# EAGLE board CP2102 USB to Serial Breakout-Panel-v13 (EAGLE 6.5.0)
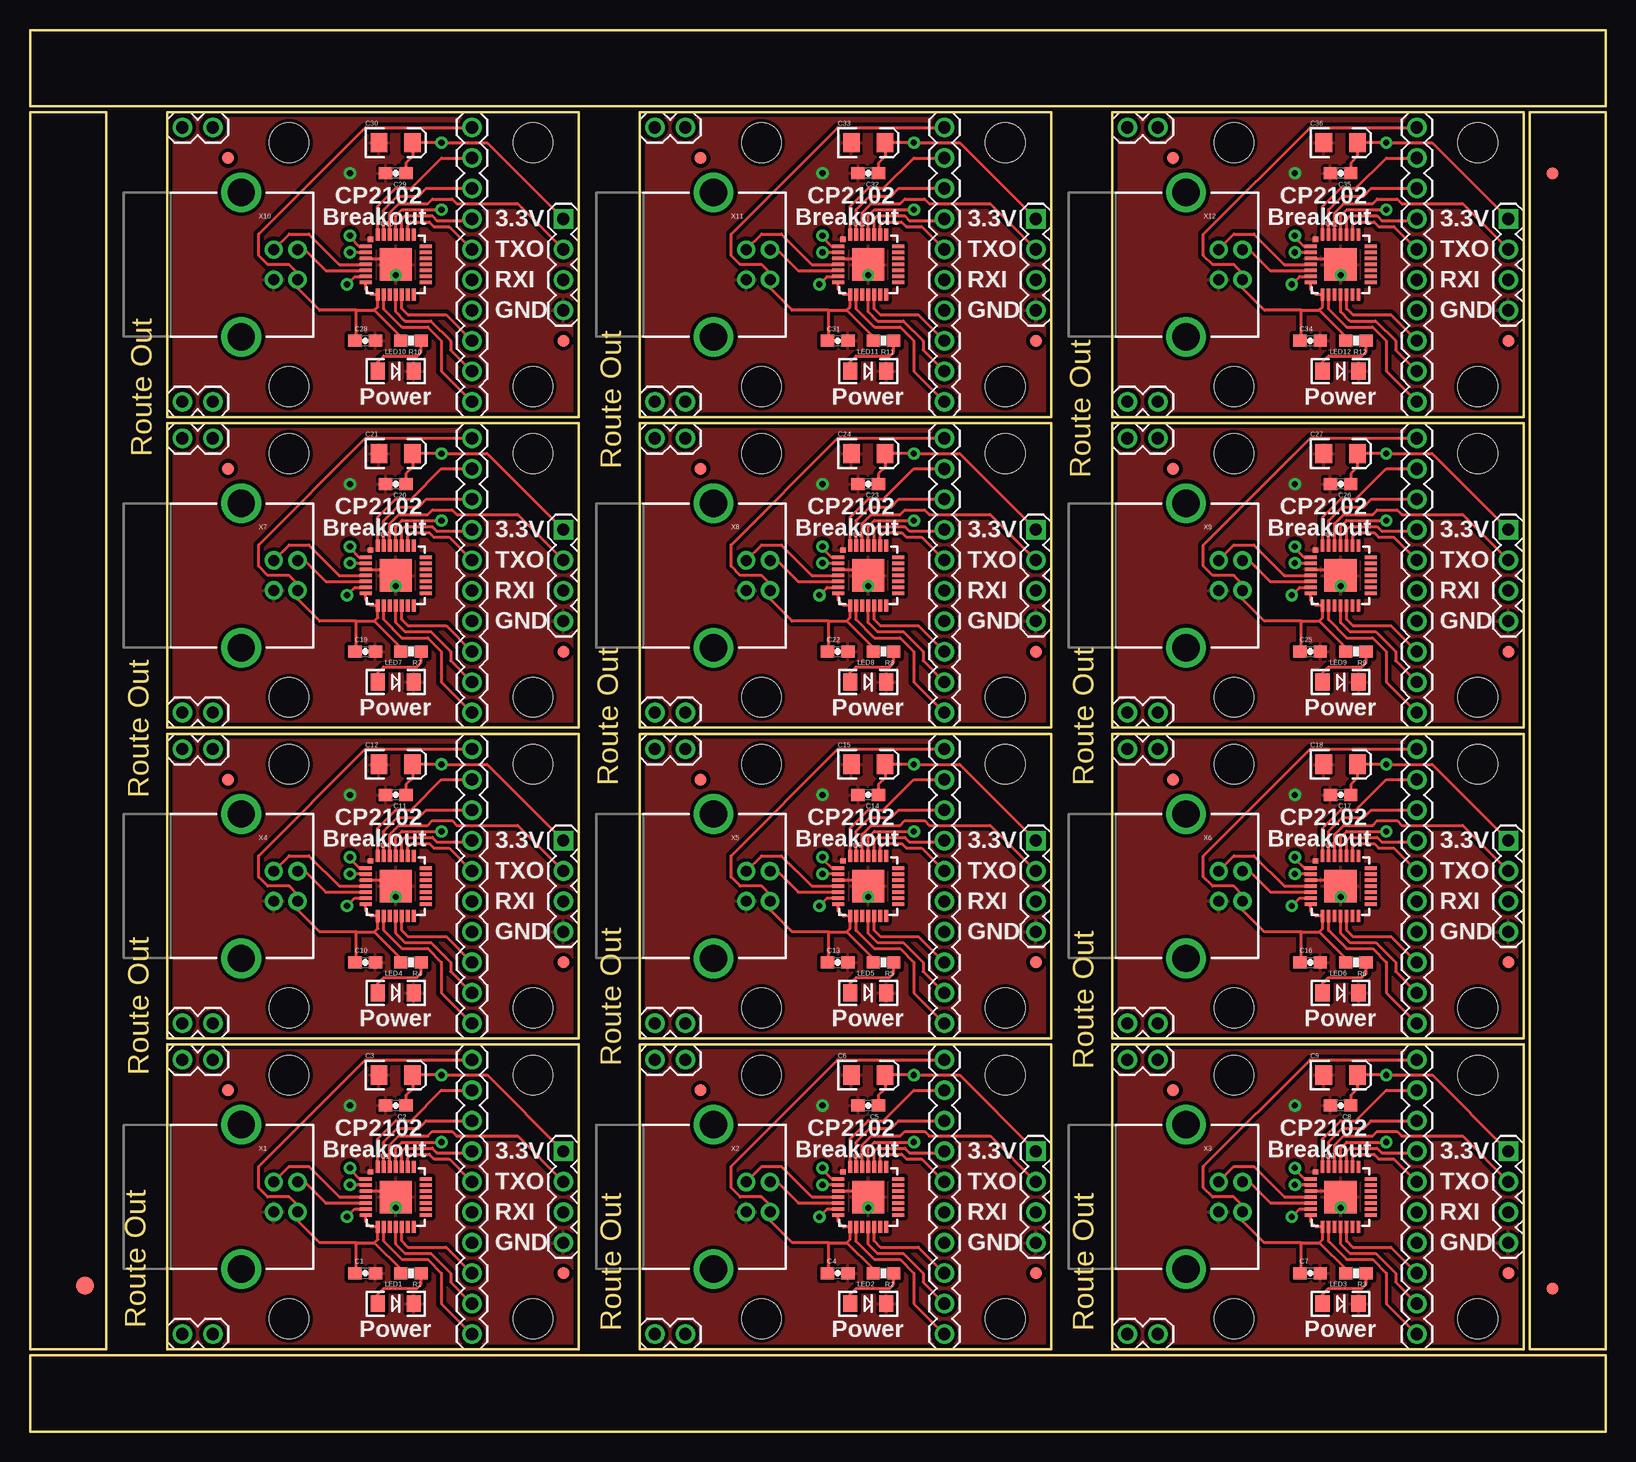
[diagram p0: board, top side]
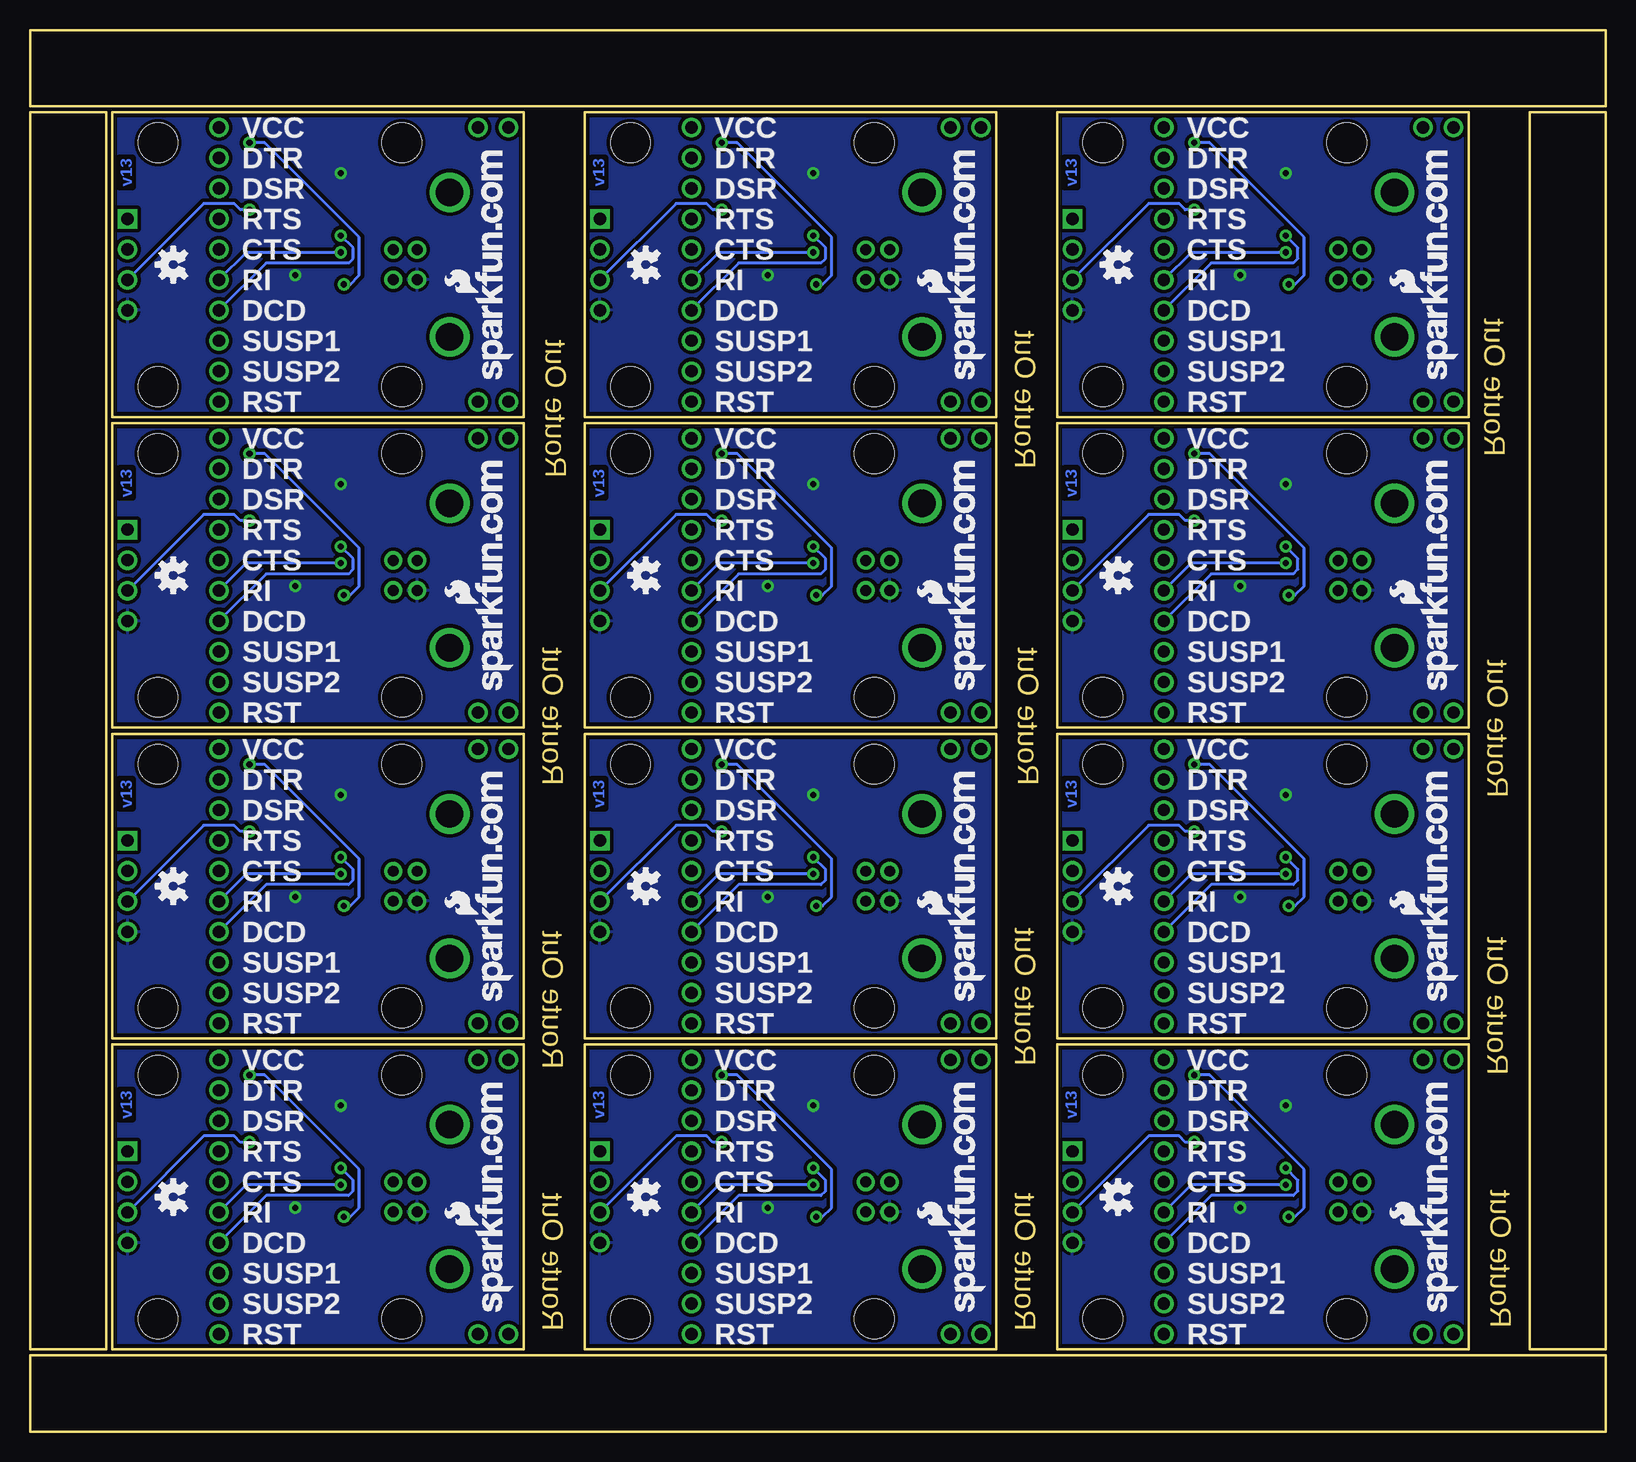
[diagram p1: board, bottom side, seen from below]

Size 131.32 x 116.84 mm. Coordinates in mm from the lower left corner, seen from the top.
Outline: 11.43,6.86 45.72,6.86 45.72,32.26 11.43,32.26 11.43,6.86
Outline: 50.8,6.86 85.09,6.86 85.09,32.26 50.8,32.26 50.8,6.86
Outline: 90.17,6.86 124.46,6.86 124.46,32.26 90.17,32.26 90.17,6.86
Outline: 11.43,32.77 45.72,32.77 45.72,58.17 11.43,58.17 11.43,32.77
Outline: 50.8,32.77 85.09,32.77 85.09,58.17 50.8,58.17 50.8,32.77
Outline: 90.17,32.77 124.46,32.77 124.46,58.17 90.17,58.17 90.17,32.77
Outline: 11.43,58.67 45.72,58.67 45.72,84.07 11.43,84.07 11.43,58.67
Outline: 50.8,58.67 85.09,58.67 85.09,84.07 50.8,84.07 50.8,58.67
Outline: 90.17,58.67 124.46,58.67 124.46,84.07 90.17,84.07 90.17,58.67
Outline: 11.43,84.58 45.72,84.58 45.72,109.98 11.43,109.98 11.43,84.58
Outline: 50.8,84.58 85.09,84.58 85.09,109.98 50.8,109.98 50.8,84.58
Outline: 90.17,84.58 124.46,84.58 124.46,109.98 90.17,109.98 90.17,84.58
Outline: 0,0 131.32,0 131.32,6.35 0,6.35 0,0
Outline: 6.35,6.86 6.35,109.98 0,109.98 0,6.86 6.35,6.86
Outline: 0,110.49 131.32,110.49 131.32,116.84 0,116.84 0,110.49
Outline: 124.97,109.98 124.97,6.86 131.32,6.86 131.32,109.98 124.97,109.98
Copper layers (1*16): Top 0.035mm / dielectric 1.5mm / Bottom 0.035mm
Design rules "SparkFun *": minimum track width 8mil, minimum drill 20mil, track to track 8mil, track to pad 8mil, pad to pad 7mil, via to via 8mil, smd to smd 8mil, copper to edge 10mil, drill to drill 8mil, minimum pad ring 12mil, minimum via ring 10mil, stop-mask expansion 4mil, vias tented up to drill 25mil, thermal gap 10mil

## Footprints (pad centres in the part's own frame; a part is rotated, then mirrored left to right if it is on the bottom)
0603-CAP = smd 1.1 x 1: 1 -0.85,0; 2 0.85,0
EIA3216 = smd 1.4 x 1.6: A 1.4,0; C -1.4,0
FIDUCIAL-1.5X3 = smd 1.5 x 1.5: 1 0,0
FIDUCIAL-1X2 = smd 1 x 1: 1 0,0
1X02 = drill 1.016: 1 0,0; 2 2.54,0
1X04 = drill 1.016 square: 1 0,0 | drill 1.016: 2 2.54,0; 3 5.08,0; 4 7.62,0
1X10 = drill 1.016: 1 0,0; 2 2.54,0; 3 5.08,0; 4 7.62,0; 5 10.16,0; 6 12.7,0; 7 15.24,0; 8 17.78,0; 9 20.32,0; 10 22.86,0
LED-1206 = smd 1.2 x 1.4: A -1.5,0; C 1.5,0
0603-RES = smd 1.1 x 1: 1 -0.85,0; 2 0.85,0
MLP28 = smd 1 x 0.3: 1 -2.5,1.5; 2 -2.5,1; 3 -2.5,0.5; 4 -2.5,0; 5 -2.5,-0.5; 6 -2.5,-1; 7 -2.5,-1.5; 15 2.5,-1.5; 16 2.5,-1; 17 2.5,-0.5; 18 2.5,0; 19 2.5,0.5; 20 2.5,1; 21 2.5,1.5 | smd 0.3 x 1: 8 -1.5,-2.5; 9 -1,-2.5; 10 -0.5,-2.5; 11 0,-2.5; 12 0.5,-2.5; 13 1,-2.5; 14 1.5,-2.5; 22 1.5,2.5; 23 1,2.5; 24 0.5,2.5; 25 0,2.5; 26 -0.5,2.5; 27 -1,2.5; 28 -1.5,2.5 | smd 2.7 x 2.7: EXP 0,0 | smd 0.435 x 0.435: M -2.103,2.103
STAND-OFF = hole 3.302: 0,0
USB-B-PTH = drill 0.914: D+ 0,1.25; D- 1.981,1.25; GND 0,-1.25; VBUS 1.981,-1.25 | drill 2.286: P$1 -2.718,-6.02; P$2 -2.718,6.02

## Placement (x,y rotation side)
C1  1uF  [0603-CAP]  27.94,13.21 0 top
C2  0.1uF  [0603-CAP]  30.48,27.18 180 top
C3  10uF  [EIA3216]  30.48,29.72 0 top
C4  1uF  [0603-CAP]  67.31,13.21 0 top
C5  0.1uF  [0603-CAP]  69.85,27.18 180 top
C6  10uF  [EIA3216]  69.85,29.72 0 top
C7  1uF  [0603-CAP]  106.68,13.21 0 top
C8  0.1uF  [0603-CAP]  109.22,27.18 180 top
C9  10uF  [EIA3216]  109.22,29.72 0 top
C10  1uF  [0603-CAP]  27.94,39.12 0 top
C11  0.1uF  [0603-CAP]  30.48,53.09 180 top
C12  10uF  [EIA3216]  30.48,55.63 0 top
C13  1uF  [0603-CAP]  67.31,39.12 0 top
C14  0.1uF  [0603-CAP]  69.85,53.09 180 top
C15  10uF  [EIA3216]  69.85,55.63 0 top
C16  1uF  [0603-CAP]  106.68,39.12 0 top
C17  0.1uF  [0603-CAP]  109.22,53.09 180 top
C18  10uF  [EIA3216]  109.22,55.63 0 top
C19  1uF  [0603-CAP]  27.94,65.02 0 top
C20  0.1uF  [0603-CAP]  30.48,78.99 180 top
C21  10uF  [EIA3216]  30.48,81.53 0 top
C22  1uF  [0603-CAP]  67.31,65.02 0 top
C23  0.1uF  [0603-CAP]  69.85,78.99 180 top
C24  10uF  [EIA3216]  69.85,81.53 0 top
C25  1uF  [0603-CAP]  106.68,65.02 0 top
C26  0.1uF  [0603-CAP]  109.22,78.99 180 top
C27  10uF  [EIA3216]  109.22,81.53 0 top
C28  1uF  [0603-CAP]  27.94,90.93 0 top
C29  0.1uF  [0603-CAP]  30.48,104.9 180 top
C30  10uF  [EIA3216]  30.48,107.44 0 top
C31  1uF  [0603-CAP]  67.31,90.93 0 top
C32  0.1uF  [0603-CAP]  69.85,104.9 180 top
C33  10uF  [EIA3216]  69.85,107.44 0 top
C34  1uF  [0603-CAP]  106.68,90.93 0 top
C35  0.1uF  [0603-CAP]  109.22,104.9 180 top
C36  10uF  [EIA3216]  109.22,107.44 0 top
E$1  [FIDUCIAL-1.5X3]  4.57,12.19 0 top
E$6  [FIDUCIAL-1X2]  126.87,104.9 180 top
E$7  [FIDUCIAL-1X2]  126.87,11.94 0 top
FID1  FIDUCIAL1X2  [FIDUCIAL-1X2]  16.51,28.45 0 top
FID2  FIDUCIAL1X2  [FIDUCIAL-1X2]  44.45,13.21 0 top
FID3  FIDUCIAL1X2  [FIDUCIAL-1X2]  55.88,28.45 0 top
FID4  FIDUCIAL1X2  [FIDUCIAL-1X2]  83.82,13.21 0 top
FID5  FIDUCIAL1X2  [FIDUCIAL-1X2]  95.25,28.45 0 top
FID6  FIDUCIAL1X2  [FIDUCIAL-1X2]  123.19,13.21 0 top
FID7  FIDUCIAL1X2  [FIDUCIAL-1X2]  16.51,54.36 0 top
FID8  FIDUCIAL1X2  [FIDUCIAL-1X2]  44.45,39.12 0 top
FID9  FIDUCIAL1X2  [FIDUCIAL-1X2]  55.88,54.36 0 top
FID10  FIDUCIAL1X2  [FIDUCIAL-1X2]  83.82,39.12 0 top
FID11  FIDUCIAL1X2  [FIDUCIAL-1X2]  95.25,54.36 0 top
FID12  FIDUCIAL1X2  [FIDUCIAL-1X2]  123.19,39.12 0 top
FID13  FIDUCIAL1X2  [FIDUCIAL-1X2]  16.51,80.26 0 top
FID14  FIDUCIAL1X2  [FIDUCIAL-1X2]  44.45,65.02 0 top
FID15  FIDUCIAL1X2  [FIDUCIAL-1X2]  55.88,80.26 0 top
FID16  FIDUCIAL1X2  [FIDUCIAL-1X2]  83.82,65.02 0 top
FID17  FIDUCIAL1X2  [FIDUCIAL-1X2]  95.25,80.26 0 top
FID18  FIDUCIAL1X2  [FIDUCIAL-1X2]  123.19,65.02 0 top
FID19  FIDUCIAL1X2  [FIDUCIAL-1X2]  16.51,106.17 0 top
FID20  FIDUCIAL1X2  [FIDUCIAL-1X2]  44.45,90.93 0 top
FID21  FIDUCIAL1X2  [FIDUCIAL-1X2]  55.88,106.17 0 top
FID22  FIDUCIAL1X2  [FIDUCIAL-1X2]  83.82,90.93 0 top
FID23  FIDUCIAL1X2  [FIDUCIAL-1X2]  95.25,106.17 0 top
FID24  FIDUCIAL1X2  [FIDUCIAL-1X2]  123.19,90.93 0 top
JP1  [1X02]  12.7,8.13 0 top
JP2  [1X02]  12.7,30.99 0 top
JP3  [1X04]  44.45,23.37 270 top
JP4  M100.1  [1X10]  36.83,30.99 270 top
JP5  [1X02]  52.07,8.13 0 top
JP6  [1X02]  52.07,30.99 0 top
JP7  [1X04]  83.82,23.37 270 top
JP8  M100.1  [1X10]  76.2,30.99 270 top
JP9  [1X02]  91.44,8.13 0 top
JP10  [1X02]  91.44,30.99 0 top
JP11  [1X04]  123.19,23.37 270 top
JP12  M100.1  [1X10]  115.57,30.99 270 top
JP13  [1X02]  12.7,34.04 0 top
JP14  [1X02]  12.7,56.9 0 top
JP15  [1X04]  44.45,49.28 270 top
JP16  M100.1  [1X10]  36.83,56.9 270 top
JP17  [1X02]  52.07,34.04 0 top
JP18  [1X02]  52.07,56.9 0 top
JP19  [1X04]  83.82,49.28 270 top
JP20  M100.1  [1X10]  76.2,56.9 270 top
JP21  [1X02]  91.44,34.04 0 top
JP22  [1X02]  91.44,56.9 0 top
JP23  [1X04]  123.19,49.28 270 top
JP24  M100.1  [1X10]  115.57,56.9 270 top
JP25  [1X02]  12.7,59.94 0 top
JP26  [1X02]  12.7,82.8 0 top
JP27  [1X04]  44.45,75.18 270 top
JP28  M100.1  [1X10]  36.83,82.8 270 top
JP29  [1X02]  52.07,59.94 0 top
JP30  [1X02]  52.07,82.8 0 top
JP31  [1X04]  83.82,75.18 270 top
JP32  M100.1  [1X10]  76.2,82.8 270 top
JP33  [1X02]  91.44,59.94 0 top
JP34  [1X02]  91.44,82.8 0 top
JP35  [1X04]  123.19,75.18 270 top
JP36  M100.1  [1X10]  115.57,82.8 270 top
JP37  [1X02]  12.7,85.85 0 top
JP38  [1X02]  12.7,108.71 0 top
JP39  [1X04]  44.45,101.09 270 top
JP40  M100.1  [1X10]  36.83,108.71 270 top
JP41  [1X02]  52.07,85.85 0 top
JP42  [1X02]  52.07,108.71 0 top
JP43  [1X04]  83.82,101.09 270 top
JP44  M100.1  [1X10]  76.2,108.71 270 top
JP45  [1X02]  91.44,85.85 0 top
JP46  [1X02]  91.44,108.71 0 top
JP47  [1X04]  123.19,101.09 270 top
JP48  M100.1  [1X10]  115.57,108.71 270 top
LED1  Red  [LED-1206]  30.48,10.67 0 top
LED2  Red  [LED-1206]  69.85,10.67 0 top
LED3  Red  [LED-1206]  109.22,10.67 0 top
LED4  Red  [LED-1206]  30.48,36.58 0 top
LED5  Red  [LED-1206]  69.85,36.58 0 top
LED6  Red  [LED-1206]  109.22,36.58 0 top
LED7  Red  [LED-1206]  30.48,62.48 0 top
LED8  Red  [LED-1206]  69.85,62.48 0 top
LED9  Red  [LED-1206]  109.22,62.48 0 top
LED10  Red  [LED-1206]  30.48,88.39 0 top
LED11  Red  [LED-1206]  69.85,88.39 0 top
LED12  Red  [LED-1206]  109.22,88.39 0 top
LOGO1  OSHW-LOGOS  [OSHW-LOGO-S]  40.64,19.56 90 bottom
LOGO2  OSHW-LOGOS  [OSHW-LOGO-S]  80.01,19.56 90 bottom
LOGO3  OSHW-LOGOS  [OSHW-LOGO-S]  119.38,19.56 90 bottom
LOGO4  OSHW-LOGOS  [OSHW-LOGO-S]  40.64,45.47 90 bottom
LOGO5  OSHW-LOGOS  [OSHW-LOGO-S]  80.01,45.47 90 bottom
LOGO6  OSHW-LOGOS  [OSHW-LOGO-S]  119.38,45.47 90 bottom
LOGO7  OSHW-LOGOS  [OSHW-LOGO-S]  40.64,71.37 90 bottom
LOGO8  OSHW-LOGOS  [OSHW-LOGO-S]  80.01,71.37 90 bottom
LOGO9  OSHW-LOGOS  [OSHW-LOGO-S]  119.38,71.37 90 bottom
LOGO10  OSHW-LOGOS  [OSHW-LOGO-S]  40.64,97.28 90 bottom
LOGO11  OSHW-LOGOS  [OSHW-LOGO-S]  80.01,97.28 90 bottom
LOGO12  OSHW-LOGOS  [OSHW-LOGO-S]  119.38,97.28 90 bottom
R1  330  [0603-RES]  31.75,13.21 180 top
R2  330  [0603-RES]  71.12,13.21 180 top
R3  330  [0603-RES]  110.49,13.21 180 top
R4  330  [0603-RES]  31.75,39.12 180 top
R5  330  [0603-RES]  71.12,39.12 180 top
R6  330  [0603-RES]  110.49,39.12 180 top
R7  330  [0603-RES]  31.75,65.02 180 top
R8  330  [0603-RES]  71.12,65.02 180 top
R9  330  [0603-RES]  110.49,65.02 180 top
R10  330  [0603-RES]  31.75,90.93 180 top
R11  330  [0603-RES]  71.12,90.93 180 top
R12  330  [0603-RES]  110.49,90.93 180 top
U1  CP2102  [MLP28]  30.48,19.56 0 top
U2  CP2102  [MLP28]  69.85,19.56 0 top
U3  CP2102  [MLP28]  109.22,19.56 0 top
U4  CP2102  [MLP28]  30.48,45.47 0 top
U5  CP2102  [MLP28]  69.85,45.47 0 top
U6  CP2102  [MLP28]  109.22,45.47 0 top
U7  CP2102  [MLP28]  30.48,71.37 0 top
U8  CP2102  [MLP28]  69.85,71.37 0 top
U9  CP2102  [MLP28]  109.22,71.37 0 top
U10  CP2102  [MLP28]  30.48,97.28 0 top
U11  CP2102  [MLP28]  69.85,97.28 0 top
U12  CP2102  [MLP28]  109.22,97.28 0 top
U$1  LOGO-SFENEW  [SFE-NEW-WEBLOGO]  12.32,10.03 90 bottom
U$2  LOGO-SFENEW  [SFE-NEW-WEBLOGO]  51.69,10.03 90 bottom
U$3  STAND-OFF  [STAND-OFF]  60.96,9.4 0 top
U$4  STAND-OFF  [STAND-OFF]  60.96,29.72 0 top
U$5  STAND-OFF  [STAND-OFF]  81.28,29.72 0 top
U$6  STAND-OFF  [STAND-OFF]  21.59,9.4 0 top
U$7  STAND-OFF  [STAND-OFF]  21.59,29.72 0 top
U$8  STAND-OFF  [STAND-OFF]  41.91,29.72 0 top
U$9  STAND-OFF  [STAND-OFF]  41.91,9.4 0 top
U$10  STAND-OFF  [STAND-OFF]  81.28,9.4 0 top
U$11  LOGO-SFENEW  [SFE-NEW-WEBLOGO]  91.06,10.03 90 bottom
U$12  STAND-OFF  [STAND-OFF]  100.33,9.4 0 top
U$13  STAND-OFF  [STAND-OFF]  100.33,29.72 0 top
U$14  STAND-OFF  [STAND-OFF]  120.65,29.72 0 top
U$15  STAND-OFF  [STAND-OFF]  120.65,9.4 0 top
U$16  LOGO-SFENEW  [SFE-NEW-WEBLOGO]  12.32,35.94 90 bottom
U$17  STAND-OFF  [STAND-OFF]  21.59,35.31 0 top
U$18  STAND-OFF  [STAND-OFF]  21.59,55.63 0 top
U$19  STAND-OFF  [STAND-OFF]  41.91,55.63 0 top
U$20  STAND-OFF  [STAND-OFF]  41.91,35.31 0 top
U$21  LOGO-SFENEW  [SFE-NEW-WEBLOGO]  51.69,35.94 90 bottom
U$22  STAND-OFF  [STAND-OFF]  60.96,35.31 0 top
U$23  STAND-OFF  [STAND-OFF]  60.96,55.63 0 top
U$24  STAND-OFF  [STAND-OFF]  81.28,55.63 0 top
U$25  STAND-OFF  [STAND-OFF]  81.28,35.31 0 top
U$26  LOGO-SFENEW  [SFE-NEW-WEBLOGO]  91.06,35.94 90 bottom
U$27  STAND-OFF  [STAND-OFF]  100.33,35.31 0 top
U$28  STAND-OFF  [STAND-OFF]  100.33,55.63 0 top
U$29  STAND-OFF  [STAND-OFF]  120.65,55.63 0 top
U$30  STAND-OFF  [STAND-OFF]  120.65,35.31 0 top
U$31  LOGO-SFENEW  [SFE-NEW-WEBLOGO]  12.32,61.85 90 bottom
U$32  STAND-OFF  [STAND-OFF]  21.59,61.21 0 top
U$33  STAND-OFF  [STAND-OFF]  21.59,81.53 0 top
U$34  STAND-OFF  [STAND-OFF]  41.91,81.53 0 top
U$35  STAND-OFF  [STAND-OFF]  41.91,61.21 0 top
U$36  LOGO-SFENEW  [SFE-NEW-WEBLOGO]  51.69,61.85 90 bottom
U$37  STAND-OFF  [STAND-OFF]  60.96,61.21 0 top
U$38  STAND-OFF  [STAND-OFF]  60.96,81.53 0 top
U$39  STAND-OFF  [STAND-OFF]  81.28,81.53 0 top
U$40  STAND-OFF  [STAND-OFF]  81.28,61.21 0 top
U$41  LOGO-SFENEW  [SFE-NEW-WEBLOGO]  91.06,61.85 90 bottom
U$42  STAND-OFF  [STAND-OFF]  100.33,61.21 0 top
U$43  STAND-OFF  [STAND-OFF]  100.33,81.53 0 top
U$44  STAND-OFF  [STAND-OFF]  120.65,81.53 0 top
U$45  STAND-OFF  [STAND-OFF]  120.65,61.21 0 top
U$46  LOGO-SFENEW  [SFE-NEW-WEBLOGO]  12.32,87.76 90 bottom
U$47  STAND-OFF  [STAND-OFF]  21.59,87.12 0 top
U$48  STAND-OFF  [STAND-OFF]  21.59,107.44 0 top
U$49  STAND-OFF  [STAND-OFF]  41.91,107.44 0 top
U$50  STAND-OFF  [STAND-OFF]  41.91,87.12 0 top
U$51  LOGO-SFENEW  [SFE-NEW-WEBLOGO]  51.69,87.76 90 bottom
U$52  STAND-OFF  [STAND-OFF]  60.96,87.12 0 top
U$53  STAND-OFF  [STAND-OFF]  60.96,107.44 0 top
U$54  STAND-OFF  [STAND-OFF]  81.28,107.44 0 top
U$55  STAND-OFF  [STAND-OFF]  81.28,87.12 0 top
U$56  LOGO-SFENEW  [SFE-NEW-WEBLOGO]  91.06,87.76 90 bottom
U$57  STAND-OFF  [STAND-OFF]  100.33,87.12 0 top
U$58  STAND-OFF  [STAND-OFF]  100.33,107.44 0 top
U$59  STAND-OFF  [STAND-OFF]  120.65,107.44 0 top
U$60  STAND-OFF  [STAND-OFF]  120.65,87.12 0 top
X1  USBPTH  [USB-B-PTH]  20.32,19.56 0 top
X2  USBPTH  [USB-B-PTH]  59.69,19.56 0 top
X3  USBPTH  [USB-B-PTH]  99.06,19.56 0 top
X4  USBPTH  [USB-B-PTH]  20.32,45.47 0 top
X5  USBPTH  [USB-B-PTH]  59.69,45.47 0 top
X6  USBPTH  [USB-B-PTH]  99.06,45.47 0 top
X7  USBPTH  [USB-B-PTH]  20.32,71.37 0 top
X8  USBPTH  [USB-B-PTH]  59.69,71.37 0 top
X9  USBPTH  [USB-B-PTH]  99.06,71.37 0 top
X10  USBPTH  [USB-B-PTH]  20.32,97.28 0 top
X11  USBPTH  [USB-B-PTH]  59.69,97.28 0 top
X12  USBPTH  [USB-B-PTH]  99.06,97.28 0 top

## Library data of the parts
C1 C4 C7 C10 C13 C16 C19 C22 C25 C28 C31 C34 = SparkFun-Capacitors; PROD_ID: CAP-00868
C2 C5 C8 C11 C14 C17 C20 C23 C26 C29 C32 C35 = SparkFun-Capacitors; PROD_ID: CAP-00810
C3 C6 C9 C12 C15 C18 C21 C24 C27 C30 C33 C36 JP1-JP48 LED1-LED12 U1-U12 U$1-U$60 X1-X12 = SparkFun
E$1 E$6 E$7 FID1-FID24 LOGO1-LOGO12 = SparkFun-Aesthetics
R1-R12 = SparkFun-Resistors; PROD_ID: RES-00818

## Nets
3.3V: C2.1 C3.A JP3.1 U1.6
3.3V1: C5.1 C6.A JP7.1 U2.6
3.3V2: C8.1 C9.A JP11.1 U3.6
3.3V3: C11.1 C12.A JP15.1 U4.6
3.3V4: C14.1 C15.A JP19.1 U5.6
3.3V5: C17.1 C18.A JP23.1 U6.6
3.3V6: C20.1 C21.A JP27.1 U7.6
3.3V7: C23.1 C24.A JP31.1 U8.6
3.3V8: C26.1 C27.A JP35.1 U9.6
3.3V9: C29.1 C30.A JP39.1 U10.6
3.3V10: C32.1 C33.A JP43.1 U11.6
3.3V11: C35.1 C36.A JP47.1 U12.6
CTS: JP4.5 U1.23
CTS1: JP8.5 U2.23
CTS2: JP12.5 U3.23
CTS3: JP16.5 U4.23
CTS4: JP20.5 U5.23
CTS5: JP24.5 U6.23
CTS6: JP28.5 U7.23
CTS7: JP32.5 U8.23
CTS8: JP36.5 U9.23
CTS9: JP40.5 U10.23
CTS10: JP44.5 U11.23
CTS11: JP48.5 U12.23
DCD: JP4.7 U1.1
DCD1: JP8.7 U2.1
DCD2: JP12.7 U3.1
DCD3: JP16.7 U4.1
DCD4: JP20.7 U5.1
DCD5: JP24.7 U6.1
DCD6: JP28.7 U7.1
DCD7: JP32.7 U8.1
DCD8: JP36.7 U9.1
DCD9: JP40.7 U10.1
DCD10: JP44.7 U11.1
DCD11: JP48.7 U12.1
DSR: JP4.3 U1.27
DSR1: JP8.3 U2.27
DSR2: JP12.3 U3.27
DSR3: JP16.3 U4.27
DSR4: JP20.3 U5.27
DSR5: JP24.3 U6.27
DSR6: JP28.3 U7.27
DSR7: JP32.3 U8.27
DSR8: JP36.3 U9.27
DSR9: JP40.3 U10.27
DSR10: JP44.3 U11.27
DSR11: JP48.3 U12.27
DTR: JP4.2 U1.28
DTR1: JP8.2 U2.28
DTR2: JP12.2 U3.28
DTR3: JP16.2 U4.28
DTR4: JP20.2 U5.28
DTR5: JP24.2 U6.28
DTR6: JP28.2 U7.28
DTR7: JP32.2 U8.28
DTR8: JP36.2 U9.28
DTR9: JP40.2 U10.28
DTR10: JP44.2 U11.28
DTR11: JP48.2 U12.28
GND: C1.2 C2.2 C3.C JP3.4 LED1.C U1.3 U1.EXP U1.M X1.GND
GND1: C4.2 C5.2 C6.C JP7.4 LED2.C U2.3 U2.EXP U2.M X2.GND
GND2: C7.2 C8.2 C9.C JP11.4 LED3.C U3.3 U3.EXP U3.M X3.GND
GND3: C10.2 C11.2 C12.C JP15.4 LED4.C U4.3 U4.EXP U4.M X4.GND
GND4: C13.2 C14.2 C15.C JP19.4 LED5.C U5.3 U5.EXP U5.M X5.GND
GND5: C16.2 C17.2 C18.C JP23.4 LED6.C U6.3 U6.EXP U6.M X6.GND
GND6: C19.2 C20.2 C21.C JP27.4 LED7.C U7.3 U7.EXP U7.M X7.GND
GND7: C22.2 C23.2 C24.C JP31.4 LED8.C U8.3 U8.EXP U8.M X8.GND
GND8: C25.2 C26.2 C27.C JP35.4 LED9.C U9.3 U9.EXP U9.M X9.GND
GND9: C28.2 C29.2 C30.C JP39.4 LED10.C U10.3 U10.EXP U10.M X10.GND
GND10: C31.2 C32.2 C33.C JP43.4 LED11.C U11.3 U11.EXP U11.M X11.GND
GND11: C34.2 C35.2 C36.C JP47.4 LED12.C U12.3 U12.EXP U12.M X12.GND
N$1: U1.5 X1.D-
N$2: U1.4 X1.D+
N$3: LED1.A R1.1
N$4: U2.5 X2.D-
N$5: U2.4 X2.D+
N$6: LED2.A R2.1
N$7: U3.5 X3.D-
N$8: U3.4 X3.D+
N$9: LED3.A R3.1
N$10: U4.5 X4.D-
N$11: U4.4 X4.D+
N$12: LED4.A R4.1
N$13: U5.5 X5.D-
N$14: U5.4 X5.D+
N$15: LED5.A R5.1
N$16: U6.5 X6.D-
N$17: U6.4 X6.D+
N$18: LED6.A R6.1
N$19: U7.5 X7.D-
N$20: U7.4 X7.D+
N$21: LED7.A R7.1
N$22: U8.5 X8.D-
N$23: U8.4 X8.D+
N$24: LED8.A R8.1
N$25: U9.5 X9.D-
N$26: U9.4 X9.D+
N$27: LED9.A R9.1
N$28: U10.5 X10.D-
N$29: U10.4 X10.D+
N$30: LED10.A R10.1
N$31: U11.5 X11.D-
N$32: U11.4 X11.D+
N$33: LED11.A R11.1
N$34: U12.5 X12.D-
N$35: U12.4 X12.D+
N$36: LED12.A R12.1
RI: JP4.6 U1.2
RI1: JP8.6 U2.2
RI2: JP12.6 U3.2
RI3: JP16.6 U4.2
RI4: JP20.6 U5.2
RI5: JP24.6 U6.2
RI6: JP28.6 U7.2
RI7: JP32.6 U8.2
RI8: JP36.6 U9.2
RI9: JP40.6 U10.2
RI10: JP44.6 U11.2
RI11: JP48.6 U12.2
RST: JP4.10 U1.9
RST1: JP8.10 U2.9
RST2: JP12.10 U3.9
RST3: JP16.10 U4.9
RST4: JP20.10 U5.9
RST5: JP24.10 U6.9
RST6: JP28.10 U7.9
RST7: JP32.10 U8.9
RST8: JP36.10 U9.9
RST9: JP40.10 U10.9
RST10: JP44.10 U11.9
RST11: JP48.10 U12.9
RTS: JP4.4 U1.24
RTS1: JP8.4 U2.24
RTS2: JP12.4 U3.24
RTS3: JP16.4 U4.24
RTS4: JP20.4 U5.24
RTS5: JP24.4 U6.24
RTS6: JP28.4 U7.24
RTS7: JP32.4 U8.24
RTS8: JP36.4 U9.24
RTS9: JP40.4 U10.24
RTS10: JP44.4 U11.24
RTS11: JP48.4 U12.24
RX: JP3.3 U1.25
RX1: JP7.3 U2.25
RX2: JP11.3 U3.25
RX3: JP15.3 U4.25
RX4: JP19.3 U5.25
RX5: JP23.3 U6.25
RX6: JP27.3 U7.25
RX7: JP31.3 U8.25
RX8: JP35.3 U9.25
RX9: JP39.3 U10.25
RX10: JP43.3 U11.25
RX11: JP47.3 U12.25
SUSP1: JP4.8 U1.12
SUSP2: JP4.9 U1.11
SUSP3: JP8.8 U2.12
SUSP4: JP8.9 U2.11
SUSP5: JP12.8 U3.12
SUSP6: JP12.9 U3.11
SUSP7: JP16.8 U4.12
SUSP8: JP16.9 U4.11
SUSP9: JP20.8 U5.12
SUSP10: JP20.9 U5.11
SUSP11: JP24.8 U6.12
SUSP12: JP24.9 U6.11
SUSP13: JP28.8 U7.12
SUSP14: JP28.9 U7.11
SUSP15: JP32.8 U8.12
SUSP16: JP32.9 U8.11
SUSP17: JP36.8 U9.12
SUSP18: JP36.9 U9.11
SUSP19: JP40.8 U10.12
SUSP20: JP40.9 U10.11
SUSP21: JP44.8 U11.12
SUSP22: JP44.9 U11.11
SUSP23: JP48.8 U12.12
SUSP24: JP48.9 U12.11
TX: JP3.2 U1.26
TX1: JP7.2 U2.26
TX2: JP11.2 U3.26
TX3: JP15.2 U4.26
TX4: JP19.2 U5.26
TX5: JP23.2 U6.26
TX6: JP27.2 U7.26
TX7: JP31.2 U8.26
TX8: JP35.2 U9.26
TX9: JP39.2 U10.26
TX10: JP43.2 U11.26
TX11: JP47.2 U12.26
VCC: C1.1 JP4.1 R1.2 U1.7 U1.8 X1.VBUS
VCC1: C4.1 JP8.1 R2.2 U2.7 U2.8 X2.VBUS
VCC2: C7.1 JP12.1 R3.2 U3.7 U3.8 X3.VBUS
VCC3: C10.1 JP16.1 R4.2 U4.7 U4.8 X4.VBUS
VCC4: C13.1 JP20.1 R5.2 U5.7 U5.8 X5.VBUS
VCC5: C16.1 JP24.1 R6.2 U6.7 U6.8 X6.VBUS
VCC6: C19.1 JP28.1 R7.2 U7.7 U7.8 X7.VBUS
VCC7: C22.1 JP32.1 R8.2 U8.7 U8.8 X8.VBUS
VCC8: C25.1 JP36.1 R9.2 U9.7 U9.8 X9.VBUS
VCC9: C28.1 JP40.1 R10.2 U10.7 U10.8 X10.VBUS
VCC10: C31.1 JP44.1 R11.2 U11.7 U11.8 X11.VBUS
VCC11: C34.1 JP48.1 R12.2 U12.7 U12.8 X12.VBUS

## Tracks (layer width: path | path; a pad name or v marks a point on that pad's centre or on a via)
3.3V  (via drill 0.51)
  Top 0.254: U1.6 27.07,18.56 v26.42,17.91 | JP3.1 38.1,29.72 v34.29,29.72 C3.A 31.88,28.58 31.33,28.03 C2.1
  Bottom 0.254: v26.42,17.91 25.91,17.91 25.15,18.67 25.15,21.84 33.02,29.72 v34.29,29.72
3.3V1  (via drill 0.51)
  Top 0.254: U2.6 66.44,18.56 v65.79,17.91 | JP7.1 77.47,29.72 v73.66,29.72 C6.A 71.25,28.58 70.7,28.03 C5.1
  Bottom 0.254: v65.79,17.91 65.28,17.91 64.52,18.67 64.52,21.84 72.39,29.72 v73.66,29.72
3.3V2  (via drill 0.51)
  Top 0.254: U3.6 105.81,18.56 v105.16,17.91 | JP11.1 116.84,29.72 v113.03,29.72 C9.A 110.62,28.58 110.07,28.03 C8.1
  Bottom 0.254: v105.16,17.91 104.65,17.91 103.89,18.67 103.89,21.84 111.76,29.72 v113.03,29.72
3.3V3  (via drill 0.51)
  Top 0.254: U4.6 27.07,44.47 v26.42,43.81 | JP15.1 38.1,55.63 v34.29,55.63 C12.A 31.88,54.49 31.33,53.94 C11.1
  Bottom 0.254: v26.42,43.81 25.91,43.81 25.15,44.58 25.15,47.75 33.02,55.63 v34.29,55.63
3.3V4  (via drill 0.51)
  Top 0.254: U5.6 66.44,44.47 v65.79,43.81 | JP19.1 77.47,55.63 v73.66,55.63 C15.A 71.25,54.49 70.7,53.94 C14.1
  Bottom 0.254: v65.79,43.81 65.28,43.81 64.52,44.58 64.52,47.75 72.39,55.63 v73.66,55.63
3.3V5  (via drill 0.51)
  Top 0.254: U6.6 105.81,44.47 v105.16,43.81 | JP23.1 116.84,55.63 v113.03,55.63 C18.A 110.62,54.49 110.07,53.94 C17.1
  Bottom 0.254: v105.16,43.81 104.65,43.81 103.89,44.58 103.89,47.75 111.76,55.63 v113.03,55.63
3.3V6  (via drill 0.51)
  Top 0.254: U7.6 27.07,70.37 v26.42,69.72 | JP27.1 38.1,81.53 v34.29,81.53 C21.A 31.88,80.39 31.33,79.84 C20.1
  Bottom 0.254: v26.42,69.72 25.91,69.72 25.15,70.48 25.15,73.66 33.02,81.53 v34.29,81.53
3.3V7  (via drill 0.51)
  Top 0.254: U8.6 66.44,70.37 v65.79,69.72 | JP31.1 77.47,81.53 v73.66,81.53 C24.A 71.25,80.39 70.7,79.84 C23.1
  Bottom 0.254: v65.79,69.72 65.28,69.72 64.52,70.48 64.52,73.66 72.39,81.53 v73.66,81.53
3.3V8  (via drill 0.51)
  Top 0.254: U9.6 105.81,70.37 v105.16,69.72 | JP35.1 116.84,81.53 v113.03,81.53 C27.A 110.62,80.39 110.07,79.84 C26.1
  Bottom 0.254: v105.16,69.72 104.65,69.72 103.89,70.48 103.89,73.66 111.76,81.53 v113.03,81.53
3.3V9  (via drill 0.51)
  Top 0.254: U10.6 27.07,96.28 v26.42,95.63 | JP39.1 38.1,107.44 v34.29,107.44 C30.A 31.88,106.3 31.33,105.75 C29.1
  Bottom 0.254: v26.42,95.63 25.91,95.63 25.15,96.39 25.15,99.57 33.02,107.44 v34.29,107.44
3.3V10  (via drill 0.51)
  Top 0.254: U11.6 66.44,96.28 v65.79,95.63 | JP43.1 77.47,107.44 v73.66,107.44 C33.A 71.25,106.3 70.7,105.75 C32.1
  Bottom 0.254: v65.79,95.63 65.28,95.63 64.52,96.39 64.52,99.57 72.39,107.44 v73.66,107.44
3.3V11  (via drill 0.51)
  Top 0.254: U12.6 105.81,96.28 v105.16,95.63 | JP47.1 116.84,107.44 v113.03,107.44 C36.A 110.62,106.3 110.07,105.75 C35.1
  Bottom 0.254: v105.16,95.63 104.65,95.63 103.89,96.39 103.89,99.57 111.76,107.44 v113.03,107.44
CTS
  Top 0.254: U1.23 31.48,22.84 31.75,23.11 33.27,23.11 33.66,22.73 34.92,22.73 JP4.5
CTS1
  Top 0.254: U2.23 70.85,22.84 71.12,23.11 72.64,23.11 73.03,22.73 74.3,22.73 JP8.5
CTS2
  Top 0.254: U3.23 110.22,22.84 110.49,23.11 112.01,23.11 112.39,22.73 113.67,22.73 JP12.5
CTS3
  Top 0.254: U4.23 31.48,48.75 31.75,49.02 33.27,49.02 33.66,48.64 34.92,48.64 JP16.5
CTS4
  Top 0.254: U5.23 70.85,48.75 71.12,49.02 72.64,49.02 73.03,48.64 74.3,48.64 JP20.5
CTS5
  Top 0.254: U6.23 110.22,48.75 110.49,49.02 112.01,49.02 112.39,48.64 113.67,48.64 JP24.5
CTS6
  Top 0.254: U7.23 31.48,74.66 31.75,74.93 33.27,74.93 33.66,74.55 34.92,74.55 JP28.5
CTS7
  Top 0.254: U8.23 70.85,74.66 71.12,74.93 72.64,74.93 73.03,74.55 74.3,74.55 JP32.5
CTS8
  Top 0.254: U9.23 110.22,74.66 110.49,74.93 112.01,74.93 112.39,74.55 113.67,74.55 JP36.5
CTS9
  Top 0.254: U10.23 31.48,100.57 31.75,100.84 33.27,100.84 33.66,100.46 34.92,100.46 JP40.5
CTS10
  Top 0.254: U11.23 70.85,100.57 71.12,100.84 72.64,100.84 73.03,100.46 74.3,100.46 JP44.5
CTS11
  Top 0.254: U12.23 110.22,100.57 110.49,100.84 112.01,100.84 112.39,100.46 113.67,100.46 JP48.5
DCD  (via drill 0.51)
  Top 0.254: v26.67,21.97 26.67,21.84 27.46,21.06 U1.1
  Bottom 0.254: v26.67,21.97 25.65,20.95 25.65,20.07 26.04,19.68 32.89,19.68 JP4.7
DCD1  (via drill 0.51)
  Top 0.254: v66.04,21.97 66.04,21.84 66.83,21.06 U2.1
  Bottom 0.254: v66.04,21.97 65.02,20.95 65.02,20.07 65.41,19.68 72.26,19.68 JP8.7
DCD2  (via drill 0.51)
  Top 0.254: v105.41,21.97 105.41,21.84 106.2,21.06 U3.1
  Bottom 0.254: v105.41,21.97 104.39,20.95 104.39,20.07 104.78,19.68 111.63,19.68 JP12.7
DCD3  (via drill 0.51)
  Top 0.254: v26.67,47.88 26.67,47.75 27.46,46.97 U4.1
  Bottom 0.254: v26.67,47.88 25.65,46.86 25.65,45.97 26.04,45.59 32.89,45.59 JP16.7
DCD4  (via drill 0.51)
  Top 0.254: v66.04,47.88 66.04,47.75 66.83,46.97 U5.1
  Bottom 0.254: v66.04,47.88 65.02,46.86 65.02,45.97 65.41,45.59 72.26,45.59 JP20.7
DCD5  (via drill 0.51)
  Top 0.254: v105.41,47.88 105.41,47.75 106.2,46.97 U6.1
  Bottom 0.254: v105.41,47.88 104.39,46.86 104.39,45.97 104.78,45.59 111.63,45.59 JP24.7
DCD6  (via drill 0.51)
  Top 0.254: v26.67,73.79 26.67,73.66 27.46,72.87 U7.1
  Bottom 0.254: v26.67,73.79 25.65,72.77 25.65,71.88 26.04,71.5 32.89,71.5 JP28.7
DCD7  (via drill 0.51)
  Top 0.254: v66.04,73.79 66.04,73.66 66.83,72.87 U8.1
  Bottom 0.254: v66.04,73.79 65.02,72.77 65.02,71.88 65.41,71.5 72.26,71.5 JP32.7
DCD8  (via drill 0.51)
  Top 0.254: v105.41,73.79 105.41,73.66 106.2,72.87 U9.1
  Bottom 0.254: v105.41,73.79 104.39,72.77 104.39,71.88 104.78,71.5 111.63,71.5 JP36.7
DCD9  (via drill 0.51)
  Top 0.254: v26.67,99.69 26.67,99.57 27.46,98.78 U10.1
  Bottom 0.254: v26.67,99.69 25.65,98.68 25.65,97.79 26.04,97.41 32.89,97.41 JP40.7
DCD10  (via drill 0.51)
  Top 0.254: v66.04,99.69 66.04,99.57 66.83,98.78 U11.1
  Bottom 0.254: v66.04,99.69 65.02,98.68 65.02,97.79 65.41,97.41 72.26,97.41 JP44.7
DCD11  (via drill 0.51)
  Top 0.254: v105.41,99.69 105.41,99.57 106.2,98.78 U12.1
  Bottom 0.254: v105.41,99.69 104.39,98.68 104.39,97.79 104.78,97.41 111.63,97.41 JP48.7
DSR
  Top 0.254: U1.27 29.48,24.15 30.61,25.27 32.38,25.27 33.02,25.91 JP4.3
DSR1
  Top 0.254: U2.27 68.85,24.15 69.98,25.27 71.75,25.27 72.39,25.91 JP8.3
DSR2
  Top 0.254: U3.27 108.22,24.15 109.35,25.27 111.12,25.27 111.76,25.91 JP12.3
DSR3
  Top 0.254: U4.27 29.48,50.05 30.61,51.18 32.38,51.18 33.02,51.82 JP16.3
DSR4
  Top 0.254: U5.27 68.85,50.05 69.98,51.18 71.75,51.18 72.39,51.82 JP20.3
DSR5
  Top 0.254: U6.27 108.22,50.05 109.35,51.18 111.12,51.18 111.76,51.82 JP24.3
DSR6
  Top 0.254: U7.27 29.48,75.96 30.61,77.09 32.38,77.09 33.02,77.72 JP28.3
DSR7
  Top 0.254: U8.27 68.85,75.96 69.98,77.09 71.75,77.09 72.39,77.72 JP32.3
DSR8
  Top 0.254: U9.27 108.22,75.96 109.35,77.09 111.12,77.09 111.76,77.72 JP36.3
DSR9
  Top 0.254: U10.27 29.48,101.87 30.61,103 32.38,103 33.02,103.63 JP40.3
DSR10
  Top 0.254: U11.27 68.85,101.87 69.98,103 71.75,103 72.39,103.63 JP44.3
DSR11
  Top 0.254: U12.27 108.22,101.87 109.35,103 111.12,103 111.76,103.63 JP48.3
DTR
  Top 0.254: U1.28 28.98,24.41 30.48,25.91 31.75,25.91 34.29,28.45 JP4.2
DTR1
  Top 0.254: U2.28 68.35,24.41 69.85,25.91 71.12,25.91 73.66,28.45 JP8.2
DTR2
  Top 0.254: U3.28 107.72,24.41 109.22,25.91 110.49,25.91 113.03,28.45 JP12.2
DTR3
  Top 0.254: U4.28 28.98,50.32 30.48,51.82 31.75,51.82 34.29,54.36 JP16.2
DTR4
  Top 0.254: U5.28 68.35,50.32 69.85,51.82 71.12,51.82 73.66,54.36 JP20.2
DTR5
  Top 0.254: U6.28 107.72,50.32 109.22,51.82 110.49,51.82 113.03,54.36 JP24.2
DTR6
  Top 0.254: U7.28 28.98,76.22 30.48,77.72 31.75,77.72 34.29,80.26 JP28.2
DTR7
  Top 0.254: U8.28 68.35,76.22 69.85,77.72 71.12,77.72 73.66,80.26 JP32.2
DTR8
  Top 0.254: U9.28 107.72,76.22 109.22,77.72 110.49,77.72 113.03,80.26 JP36.2
DTR9
  Top 0.254: U10.28 28.98,102.13 30.48,103.63 31.75,103.63 34.29,106.17 JP40.2
DTR10
  Top 0.254: U11.28 68.35,102.13 69.85,103.63 71.12,103.63 73.66,106.17 JP44.2
DTR11
  Top 0.254: U12.28 107.72,102.13 109.22,103.63 110.49,103.63 113.03,106.17 JP48.2
GND  (via drill 0.51)
  Top 0.254: U1.3 29.98,20.06 U1.EXP
  other vias: 26.67,27.18 30.48,18.67
  pour Bottom (isolate 0.305): 11.43,6.86 11.43,32.26 45.72,32.26 45.72,6.86
  pour Top (isolate 0.305): 11.43,6.86 11.43,32.26 45.72,32.26 45.72,6.86
GND1  (via drill 0.51)
  Top 0.254: U2.3 69.35,20.06 U2.EXP
  other vias: 66.04,27.18 69.85,18.67
  pour Bottom (isolate 0.305): 50.8,6.86 50.8,32.26 85.09,32.26 85.09,6.86
  pour Top (isolate 0.305): 50.8,6.86 50.8,32.26 85.09,32.26 85.09,6.86
GND2  (via drill 0.51)
  Top 0.254: U3.3 108.72,20.06 U3.EXP
  other vias: 105.41,27.18 109.22,18.67
  pour Bottom (isolate 0.305): 90.17,6.86 90.17,32.26 124.46,32.26 124.46,6.86
  pour Top (isolate 0.305): 90.17,6.86 90.17,32.26 124.46,32.26 124.46,6.86
GND3  (via drill 0.51)
  Top 0.254: U4.3 29.98,45.97 U4.EXP
  other vias: 26.67,53.09 30.48,44.58
  pour Bottom (isolate 0.305): 11.43,32.77 11.43,58.17 45.72,58.17 45.72,32.77
  pour Top (isolate 0.305): 11.43,32.77 11.43,58.17 45.72,58.17 45.72,32.77
GND4  (via drill 0.51)
  Top 0.254: U5.3 69.35,45.97 U5.EXP
  other vias: 66.04,53.09 69.85,44.58
  pour Bottom (isolate 0.305): 50.8,32.77 50.8,58.17 85.09,58.17 85.09,32.77
  pour Top (isolate 0.305): 50.8,32.77 50.8,58.17 85.09,58.17 85.09,32.77
GND5  (via drill 0.51)
  Top 0.254: U6.3 108.72,45.97 U6.EXP
  other vias: 105.41,53.09 109.22,44.58
  pour Bottom (isolate 0.305): 90.17,32.77 90.17,58.17 124.46,58.17 124.46,32.77
  pour Top (isolate 0.305): 90.17,32.77 90.17,58.17 124.46,58.17 124.46,32.77
GND6  (via drill 0.51)
  Top 0.254: U7.3 29.98,71.87 U7.EXP
  other vias: 26.67,78.99 30.48,70.48
  pour Bottom (isolate 0.305): 11.43,58.67 11.43,84.07 45.72,84.07 45.72,58.67
  pour Top (isolate 0.305): 11.43,58.67 11.43,84.07 45.72,84.07 45.72,58.67
GND7  (via drill 0.51)
  Top 0.254: U8.3 69.35,71.87 U8.EXP
  other vias: 66.04,78.99 69.85,70.48
  pour Bottom (isolate 0.305): 50.8,58.67 50.8,84.07 85.09,84.07 85.09,58.67
  pour Top (isolate 0.305): 50.8,58.67 50.8,84.07 85.09,84.07 85.09,58.67
GND8  (via drill 0.51)
  Top 0.254: U9.3 108.72,71.87 U9.EXP
  other vias: 105.41,78.99 109.22,70.48
  pour Bottom (isolate 0.305): 90.17,58.67 90.17,84.07 124.46,84.07 124.46,58.67
  pour Top (isolate 0.305): 90.17,58.67 90.17,84.07 124.46,84.07 124.46,58.67
GND9  (via drill 0.51)
  Top 0.254: U10.3 29.98,97.78 U10.EXP
  other vias: 26.67,104.9 30.48,96.39
  pour Bottom (isolate 0.305): 11.43,84.58 11.43,109.98 45.72,109.98 45.72,84.58
  pour Top (isolate 0.305): 11.43,84.58 11.43,109.98 45.72,109.98 45.72,84.58
GND10  (via drill 0.51)
  Top 0.254: U11.3 69.35,97.78 U11.EXP
  other vias: 66.04,104.9 69.85,96.39
  pour Bottom (isolate 0.305): 50.8,84.58 50.8,109.98 85.09,109.98 85.09,84.58
  pour Top (isolate 0.305): 50.8,84.58 50.8,109.98 85.09,109.98 85.09,84.58
GND11  (via drill 0.51)
  Top 0.254: U12.3 108.72,97.78 U12.EXP
  other vias: 105.41,104.9 109.22,96.39
  pour Bottom (isolate 0.305): 90.17,84.58 90.17,109.98 124.46,109.98 124.46,84.58
  pour Top (isolate 0.305): 90.17,84.58 90.17,109.98 124.46,109.98 124.46,84.58
N$1
  Top 0.254: X1.D- 22.88,20.81 24.63,19.06 U1.5
N$2
  Top 0.254: U1.4 25.78,19.56 23.24,22.1 21.59,22.1 20.32,20.83 X1.D+
N$3
  Top 0.254: R1.1 32.6,12.28 32.26,11.94 29.46,11.94 28.98,11.45 LED1.A
N$4
  Top 0.254: X2.D- 62.25,20.81 64,19.06 U2.5
N$5
  Top 0.254: U2.4 65.15,19.56 62.61,22.1 60.96,22.1 59.69,20.83 X2.D+
N$6
  Top 0.254: R2.1 71.97,12.28 71.63,11.94 68.83,11.94 68.35,11.45 LED2.A
N$7
  Top 0.254: X3.D- 101.62,20.81 103.37,19.06 U3.5
N$8
  Top 0.254: U3.4 104.52,19.56 101.98,22.1 100.33,22.1 99.06,20.83 X3.D+
N$9
  Top 0.254: R3.1 111.34,12.28 111,11.94 108.2,11.94 107.72,11.45 LED3.A
N$10
  Top 0.254: X4.D- 22.88,46.72 24.63,44.97 U4.5
N$11
  Top 0.254: U4.4 25.78,45.47 23.24,48.01 21.59,48.01 20.32,46.74 X4.D+
N$12
  Top 0.254: R4.1 32.6,38.19 32.26,37.85 29.46,37.85 28.98,37.36 LED4.A
N$13
  Top 0.254: X5.D- 62.25,46.72 64,44.97 U5.5
N$14
  Top 0.254: U5.4 65.15,45.47 62.61,48.01 60.96,48.01 59.69,46.74 X5.D+
N$15
  Top 0.254: R5.1 71.97,38.19 71.63,37.85 68.83,37.85 68.35,37.36 LED5.A
N$16
  Top 0.254: X6.D- 101.62,46.72 103.37,44.97 U6.5
N$17
  Top 0.254: U6.4 104.52,45.47 101.98,48.01 100.33,48.01 99.06,46.74 X6.D+
N$18
  Top 0.254: R6.1 111.34,38.19 111,37.85 108.2,37.85 107.72,37.36 LED6.A
N$19
  Top 0.254: X7.D- 22.88,72.62 24.63,70.87 U7.5
N$20
  Top 0.254: U7.4 25.78,71.37 23.24,73.91 21.59,73.91 20.32,72.64 X7.D+
N$21
  Top 0.254: R7.1 32.6,64.1 32.26,63.75 29.46,63.75 28.98,63.27 LED7.A
N$22
  Top 0.254: X8.D- 62.25,72.62 64,70.87 U8.5
N$23
  Top 0.254: U8.4 65.15,71.37 62.61,73.91 60.96,73.91 59.69,72.64 X8.D+
N$24
  Top 0.254: R8.1 71.97,64.1 71.63,63.75 68.83,63.75 68.35,63.27 LED8.A
N$25
  Top 0.254: X9.D- 101.62,72.62 103.37,70.87 U9.5
N$26
  Top 0.254: U9.4 104.52,71.37 101.98,73.91 100.33,73.91 99.06,72.64 X9.D+
N$27
  Top 0.254: R9.1 111.34,64.1 111,63.75 108.2,63.75 107.72,63.27 LED9.A
N$28
  Top 0.254: X10.D- 22.88,98.53 24.63,96.78 U10.5
N$29
  Top 0.254: U10.4 25.78,97.28 23.24,99.82 21.59,99.82 20.32,98.55 X10.D+
N$30
  Top 0.254: R10.1 32.6,90 32.26,89.66 29.46,89.66 28.98,89.18 LED10.A
N$31
  Top 0.254: X11.D- 62.25,98.53 64,96.78 U11.5
N$32
  Top 0.254: U11.4 65.15,97.28 62.61,99.82 60.96,99.82 59.69,98.55 X11.D+
N$33
  Top 0.254: R11.1 71.97,90 71.63,89.66 68.83,89.66 68.35,89.18 LED11.A
N$34
  Top 0.254: X12.D- 101.62,98.53 103.37,96.78 U12.5
N$35
  Top 0.254: U12.4 104.52,97.28 101.98,99.82 100.33,99.82 99.06,98.55 X12.D+
N$36
  Top 0.254: R12.1 111.34,90 111,89.66 108.2,89.66 107.72,89.18 LED12.A
RI  (via drill 0.51)
  Top 0.254: U1.2 26.69,20.56 v26.67,20.57
  Bottom 0.254: v26.67,20.57 34.54,20.57 JP4.6
RI1  (via drill 0.51)
  Top 0.254: U2.2 66.06,20.56 v66.04,20.57
  Bottom 0.254: v66.04,20.57 73.91,20.57 JP8.6
RI2  (via drill 0.51)
  Top 0.254: U3.2 105.43,20.56 v105.41,20.57
  Bottom 0.254: v105.41,20.57 113.28,20.57 JP12.6
RI3  (via drill 0.51)
  Top 0.254: U4.2 26.69,46.47 v26.67,46.48
  Bottom 0.254: v26.67,46.48 34.54,46.48 JP16.6
RI4  (via drill 0.51)
  Top 0.254: U5.2 66.06,46.47 v66.04,46.48
  Bottom 0.254: v66.04,46.48 73.91,46.48 JP20.6
RI5  (via drill 0.51)
  Top 0.254: U6.2 105.43,46.47 v105.41,46.48
  Bottom 0.254: v105.41,46.48 113.28,46.48 JP24.6
RI6  (via drill 0.51)
  Top 0.254: U7.2 26.69,72.37 v26.67,72.39
  Bottom 0.254: v26.67,72.39 34.54,72.39 JP28.6
RI7  (via drill 0.51)
  Top 0.254: U8.2 66.06,72.37 v66.04,72.39
  Bottom 0.254: v66.04,72.39 73.91,72.39 JP32.6
RI8  (via drill 0.51)
  Top 0.254: U9.2 105.43,72.37 v105.41,72.39
  Bottom 0.254: v105.41,72.39 113.28,72.39 JP36.6
RI9  (via drill 0.51)
  Top 0.254: U10.2 26.69,98.28 v26.67,98.3
  Bottom 0.254: v26.67,98.3 34.54,98.3 JP40.6
RI10  (via drill 0.51)
  Top 0.254: U11.2 66.06,98.28 v66.04,98.3
  Bottom 0.254: v66.04,98.3 73.91,98.3 JP44.6
RI11  (via drill 0.51)
  Top 0.254: U12.2 105.43,98.28 v105.41,98.3
  Bottom 0.254: v105.41,98.3 113.28,98.3 JP48.6
RST
  Top 0.254: U1.9 29.48,15.86 30.99,14.35 33.15,14.35 34.29,13.21 34.29,10.67 JP4.10
RST1
  Top 0.254: U2.9 68.85,15.86 70.36,14.35 72.52,14.35 73.66,13.21 73.66,10.67 JP8.10
RST2
  Top 0.254: U3.9 108.22,15.86 109.73,14.35 111.89,14.35 113.03,13.21 113.03,10.67 JP12.10
RST3
  Top 0.254: U4.9 29.48,41.77 30.99,40.26 33.15,40.26 34.29,39.12 34.29,36.58 JP16.10
RST4
  Top 0.254: U5.9 68.85,41.77 70.36,40.26 72.52,40.26 73.66,39.12 73.66,36.58 JP20.10
RST5
  Top 0.254: U6.9 108.22,41.77 109.73,40.26 111.89,40.26 113.03,39.12 113.03,36.58 JP24.10
RST6
  Top 0.254: U7.9 29.48,67.67 30.99,66.17 33.15,66.17 34.29,65.02 34.29,62.48 JP28.10
RST7
  Top 0.254: U8.9 68.85,67.67 70.36,66.17 72.52,66.17 73.66,65.02 73.66,62.48 JP32.10
RST8
  Top 0.254: U9.9 108.22,67.67 109.73,66.17 111.89,66.17 113.03,65.02 113.03,62.48 JP36.10
RST9
  Top 0.254: U10.9 29.48,93.58 30.99,92.08 33.15,92.08 34.29,90.93 34.29,88.39 JP40.10
RST10
  Top 0.254: U11.9 68.85,93.58 70.36,92.08 72.52,92.08 73.66,90.93 73.66,88.39 JP44.10
RST11
  Top 0.254: U12.9 108.22,93.58 109.73,92.08 111.89,92.08 113.03,90.93 113.03,88.39 JP48.10
RTS
  Top 0.254: U1.24 30.98,23.36 31.24,23.62 33.53,23.62 33.91,23.24 36.7,23.24 JP4.4
RTS1
  Top 0.254: U2.24 70.35,23.36 70.61,23.62 72.9,23.62 73.28,23.24 76.07,23.24 JP8.4
RTS2
  Top 0.254: U3.24 109.72,23.36 109.98,23.62 112.27,23.62 112.65,23.24 115.44,23.24 JP12.4
RTS3
  Top 0.254: U4.24 30.98,49.27 31.24,49.53 33.53,49.53 33.91,49.15 36.7,49.15 JP16.4
RTS4
  Top 0.254: U5.24 70.35,49.27 70.61,49.53 72.9,49.53 73.28,49.15 76.07,49.15 JP20.4
RTS5
  Top 0.254: U6.24 109.72,49.27 109.98,49.53 112.27,49.53 112.65,49.15 115.44,49.15 JP24.4
RTS6
  Top 0.254: U7.24 30.98,75.18 31.24,75.44 33.53,75.44 33.91,75.06 36.7,75.06 JP28.4
RTS7
  Top 0.254: U8.24 70.35,75.18 70.61,75.44 72.9,75.44 73.28,75.06 76.07,75.06 JP32.4
RTS8
  Top 0.254: U9.24 109.72,75.18 109.98,75.44 112.27,75.44 112.65,75.06 115.44,75.06 JP36.4
RTS9
  Top 0.254: U10.24 30.98,101.08 31.24,101.35 33.53,101.35 33.91,100.97 36.7,100.97 JP40.4
RTS10
  Top 0.254: U11.24 70.35,101.08 70.61,101.35 72.9,101.35 73.28,100.97 76.07,100.97 JP44.4
RTS11
  Top 0.254: U12.24 109.72,101.08 109.98,101.35 112.27,101.35 112.65,100.97 115.44,100.97 JP48.4
RX  (via drill 0.51)
  Top 0.254: U1.25 30.48,23.62 30.99,24.13 v34.29,24.13
  Bottom 0.254: v34.29,24.13 35.05,24.13 35.56,24.64 38.1,24.64 JP3.3
RX1  (via drill 0.51)
  Top 0.254: U2.25 69.85,23.62 70.36,24.13 v73.66,24.13
  Bottom 0.254: v73.66,24.13 74.42,24.13 74.93,24.64 77.47,24.64 JP7.3
RX2  (via drill 0.51)
  Top 0.254: U3.25 109.22,23.62 109.73,24.13 v113.03,24.13
  Bottom 0.254: v113.03,24.13 113.79,24.13 114.3,24.64 116.84,24.64 JP11.3
RX3  (via drill 0.51)
  Top 0.254: U4.25 30.48,49.53 30.99,50.04 v34.29,50.04
  Bottom 0.254: v34.29,50.04 35.05,50.04 35.56,50.55 38.1,50.55 JP15.3
RX4  (via drill 0.51)
  Top 0.254: U5.25 69.85,49.53 70.36,50.04 v73.66,50.04
  Bottom 0.254: v73.66,50.04 74.42,50.04 74.93,50.55 77.47,50.55 JP19.3
RX5  (via drill 0.51)
  Top 0.254: U6.25 109.22,49.53 109.73,50.04 v113.03,50.04
  Bottom 0.254: v113.03,50.04 113.79,50.04 114.3,50.55 116.84,50.55 JP23.3
RX6  (via drill 0.51)
  Top 0.254: U7.25 30.48,75.44 30.99,75.95 v34.29,75.95
  Bottom 0.254: v34.29,75.95 35.05,75.95 35.56,76.45 38.1,76.45 JP27.3
RX7  (via drill 0.51)
  Top 0.254: U8.25 69.85,75.44 70.36,75.95 v73.66,75.95
  Bottom 0.254: v73.66,75.95 74.42,75.95 74.93,76.45 77.47,76.45 JP31.3
RX8  (via drill 0.51)
  Top 0.254: U9.25 109.22,75.44 109.73,75.95 v113.03,75.95
  Bottom 0.254: v113.03,75.95 113.79,75.95 114.3,76.45 116.84,76.45 JP35.3
RX9  (via drill 0.51)
  Top 0.254: U10.25 30.48,101.35 30.99,101.85 v34.29,101.85
  Bottom 0.254: v34.29,101.85 35.05,101.85 35.56,102.36 38.1,102.36 JP39.3
RX10  (via drill 0.51)
  Top 0.254: U11.25 69.85,101.35 70.36,101.85 v73.66,101.85
  Bottom 0.254: v73.66,101.85 74.42,101.85 74.93,102.36 77.47,102.36 JP43.3
RX11  (via drill 0.51)
  Top 0.254: U12.25 109.22,101.35 109.73,101.85 v113.03,101.85
  Bottom 0.254: v113.03,101.85 113.79,101.85 114.3,102.36 116.84,102.36 JP47.3
SUSP1
  Top 0.254: U1.12 30.98,15.88 31.5,15.37 34.67,15.37 JP4.8
SUSP2
  Top 0.254: U1.11 30.48,15.62 31.24,14.86 33.4,14.86 35.05,13.21 35.05,12.45 JP4.9
SUSP3
  Top 0.254: U2.12 70.35,15.88 70.87,15.37 74.04,15.37 JP8.8
SUSP4
  Top 0.254: U2.11 69.85,15.62 70.61,14.86 72.77,14.86 74.42,13.21 74.42,12.45 JP8.9
SUSP5
  Top 0.254: U3.12 109.72,15.88 110.24,15.37 113.41,15.37 JP12.8
SUSP6
  Top 0.254: U3.11 109.22,15.62 109.98,14.86 112.14,14.86 113.79,13.21 113.79,12.45 JP12.9
SUSP7
  Top 0.254: U4.12 30.98,41.79 31.5,41.27 34.67,41.27 JP16.8
SUSP8
  Top 0.254: U4.11 30.48,41.53 31.24,40.77 33.4,40.77 35.05,39.12 35.05,38.35 JP16.9
SUSP9
  Top 0.254: U5.12 70.35,41.79 70.87,41.27 74.04,41.27 JP20.8
SUSP10
  Top 0.254: U5.11 69.85,41.53 70.61,40.77 72.77,40.77 74.42,39.12 74.42,38.35 JP20.9
SUSP11
  Top 0.254: U6.12 109.72,41.79 110.24,41.27 113.41,41.27 JP24.8
SUSP12
  Top 0.254: U6.11 109.22,41.53 109.98,40.77 112.14,40.77 113.79,39.12 113.79,38.35 JP24.9
SUSP13
  Top 0.254: U7.12 30.98,67.7 31.5,67.18 34.67,67.18 JP28.8
SUSP14
  Top 0.254: U7.11 30.48,67.44 31.24,66.67 33.4,66.67 35.05,65.02 35.05,64.26 JP28.9
SUSP15
  Top 0.254: U8.12 70.35,67.7 70.87,67.18 74.04,67.18 JP32.8
SUSP16
  Top 0.254: U8.11 69.85,67.44 70.61,66.67 72.77,66.67 74.42,65.02 74.42,64.26 JP32.9
SUSP17
  Top 0.254: U9.12 109.72,67.7 110.24,67.18 113.41,67.18 JP36.8
SUSP18
  Top 0.254: U9.11 109.22,67.44 109.98,66.67 112.14,66.67 113.79,65.02 113.79,64.26 JP36.9
SUSP19
  Top 0.254: U10.12 30.98,93.61 31.5,93.09 34.67,93.09 JP40.8
SUSP20
  Top 0.254: U10.11 30.48,93.34 31.24,92.58 33.4,92.58 35.05,90.93 35.05,90.17 JP40.9
SUSP21
  Top 0.254: U11.12 70.35,93.61 70.87,93.09 74.04,93.09 JP44.8
SUSP22
  Top 0.254: U11.11 69.85,93.34 70.61,92.58 72.77,92.58 74.42,90.93 74.42,90.17 JP44.9
SUSP23
  Top 0.254: U12.12 109.72,93.61 110.24,93.09 113.41,93.09 JP48.8
SUSP24
  Top 0.254: U12.11 109.22,93.34 109.98,92.58 112.14,92.58 113.79,90.93 113.79,90.17 JP48.9
TX
  Top 0.254: U1.26 29.98,23.88 30.73,24.64 33.15,24.64 33.53,25.02 35.18,25.02 35.56,24.64 40.64,24.64 JP3.2
TX1
  Top 0.254: U2.26 69.35,23.88 70.1,24.64 72.52,24.64 72.9,25.02 74.55,25.02 74.93,24.64 80.01,24.64 JP7.2
TX2
  Top 0.254: U3.26 108.72,23.88 109.47,24.64 111.89,24.64 112.27,25.02 113.92,25.02 114.3,24.64 119.38,24.64 JP11.2
TX3
  Top 0.254: U4.26 29.98,49.79 30.73,50.55 33.15,50.55 33.53,50.93 35.18,50.93 35.56,50.55 40.64,50.55 JP15.2
TX4
  Top 0.254: U5.26 69.35,49.79 70.1,50.55 72.52,50.55 72.9,50.93 74.55,50.93 74.93,50.55 80.01,50.55 JP19.2
TX5
  Top 0.254: U6.26 108.72,49.79 109.47,50.55 111.89,50.55 112.27,50.93 113.92,50.93 114.3,50.55 119.38,50.55 JP23.2
TX6
  Top 0.254: U7.26 29.98,75.7 30.73,76.45 33.15,76.45 33.53,76.83 35.18,76.83 35.56,76.45 40.64,76.45 JP27.2
TX7
  Top 0.254: U8.26 69.35,75.7 70.1,76.45 72.52,76.45 72.9,76.83 74.55,76.83 74.93,76.45 80.01,76.45 JP31.2
TX8
  Top 0.254: U9.26 108.72,75.7 109.47,76.45 111.89,76.45 112.27,76.83 113.92,76.83 114.3,76.45 119.38,76.45 JP35.2
TX9
  Top 0.254: U10.26 29.98,101.61 30.73,102.36 33.15,102.36 33.53,102.74 35.18,102.74 35.56,102.36 40.64,102.36 JP39.2
TX10
  Top 0.254: U11.26 69.35,101.61 70.1,102.36 72.52,102.36 72.9,102.74 74.55,102.74 74.93,102.36 80.01,102.36 JP43.2
TX11
  Top 0.254: U12.26 108.72,101.61 109.47,102.36 111.89,102.36 112.27,102.74 113.92,102.74 114.3,102.36 119.38,102.36 JP47.2
VCC
  Top 0.254: JP4.1 27.94,30.99 19.05,22.1 19.05,20.32 19.81,19.56 21.59,19.56 22.3,18.85 X1.VBUS 22.3,17.58 24.13,15.75 27.18,15.75 | 28.7,15.75 28.98,16.03 U1.8 28.41,17.06 27.98,17.49 U1.7 | 27.18,15.75 28.7,15.75 | 27.18,15.75 27.18,13.21 C1.1 | R1.2 30.9,13.55 28.7,15.75
VCC1
  Top 0.254: JP8.1 67.31,30.99 58.42,22.1 58.42,20.32 59.18,19.56 60.96,19.56 61.67,18.85 X2.VBUS 61.67,17.58 63.5,15.75 66.55,15.75 | 68.07,15.75 68.35,16.03 U2.8 67.78,17.06 67.35,17.49 U2.7 | 66.55,15.75 68.07,15.75 | 66.55,15.75 66.55,13.21 C4.1 | R2.2 70.27,13.55 68.07,15.75
VCC2
  Top 0.254: JP12.1 106.68,30.99 97.79,22.1 97.79,20.32 98.55,19.56 100.33,19.56 101.04,18.85 X3.VBUS 101.04,17.58 102.87,15.75 105.92,15.75 | 107.44,15.75 107.72,16.03 U3.8 107.15,17.06 106.72,17.49 U3.7 | 105.92,15.75 107.44,15.75 | 105.92,15.75 105.92,13.21 C7.1 | R3.2 109.64,13.55 107.44,15.75
VCC3
  Top 0.254: JP16.1 27.94,56.9 19.05,48.01 19.05,46.23 19.81,45.47 21.59,45.47 22.3,44.76 X4.VBUS 22.3,43.48 24.13,41.66 27.18,41.66 | 28.7,41.66 28.98,41.93 U4.8 28.41,42.97 27.98,43.39 U4.7 | 27.18,41.66 28.7,41.66 | 27.18,41.66 27.18,39.12 C10.1 | R4.2 30.9,39.46 28.7,41.66
VCC4
  Top 0.254: JP20.1 67.31,56.9 58.42,48.01 58.42,46.23 59.18,45.47 60.96,45.47 61.67,44.76 X5.VBUS 61.67,43.48 63.5,41.66 66.55,41.66 | 68.07,41.66 68.35,41.93 U5.8 67.78,42.97 67.35,43.39 U5.7 | 66.55,41.66 68.07,41.66 | 66.55,41.66 66.55,39.12 C13.1 | R5.2 70.27,39.46 68.07,41.66
VCC5
  Top 0.254: JP24.1 106.68,56.9 97.79,48.01 97.79,46.23 98.55,45.47 100.33,45.47 101.04,44.76 X6.VBUS 101.04,43.48 102.87,41.66 105.92,41.66 | 107.44,41.66 107.72,41.93 U6.8 107.15,42.97 106.72,43.39 U6.7 | 105.92,41.66 107.44,41.66 | 105.92,41.66 105.92,39.12 C16.1 | R6.2 109.64,39.46 107.44,41.66
VCC6
  Top 0.254: JP28.1 27.94,82.8 19.05,73.91 19.05,72.14 19.81,71.37 21.59,71.37 22.3,70.66 X7.VBUS 22.3,69.39 24.13,67.56 27.18,67.56 | 28.7,67.56 28.98,67.84 U7.8 28.41,68.87 27.98,69.3 U7.7 | 27.18,67.56 28.7,67.56 | 27.18,67.56 27.18,65.02 C19.1 | R7.2 30.9,65.37 28.7,67.56
VCC7
  Top 0.254: JP32.1 67.31,82.8 58.42,73.91 58.42,72.14 59.18,71.37 60.96,71.37 61.67,70.66 X8.VBUS 61.67,69.39 63.5,67.56 66.55,67.56 | 68.07,67.56 68.35,67.84 U8.8 67.78,68.87 67.35,69.3 U8.7 | 66.55,67.56 68.07,67.56 | 66.55,67.56 66.55,65.02 C22.1 | R8.2 70.27,65.37 68.07,67.56
VCC8
  Top 0.254: JP36.1 106.68,82.8 97.79,73.91 97.79,72.14 98.55,71.37 100.33,71.37 101.04,70.66 X9.VBUS 101.04,69.39 102.87,67.56 105.92,67.56 | 107.44,67.56 107.72,67.84 U9.8 107.15,68.87 106.72,69.3 U9.7 | 105.92,67.56 107.44,67.56 | 105.92,67.56 105.92,65.02 C25.1 | R9.2 109.64,65.37 107.44,67.56
VCC9
  Top 0.254: JP40.1 27.94,108.71 19.05,99.82 19.05,98.04 19.81,97.28 21.59,97.28 22.3,96.57 X10.VBUS 22.3,95.3 24.13,93.47 27.18,93.47 | 28.7,93.47 28.98,93.75 U10.8 28.41,94.78 27.98,95.21 U10.7 | 27.18,93.47 28.7,93.47 | 27.18,93.47 27.18,90.93 C28.1 | R10.2 30.9,91.27 28.7,93.47
VCC10
  Top 0.254: JP44.1 67.31,108.71 58.42,99.82 58.42,98.04 59.18,97.28 60.96,97.28 61.67,96.57 X11.VBUS 61.67,95.3 63.5,93.47 66.55,93.47 | 68.07,93.47 68.35,93.75 U11.8 67.78,94.78 67.35,95.21 U11.7 | 66.55,93.47 68.07,93.47 | 66.55,93.47 66.55,90.93 C31.1 | R11.2 70.27,91.27 68.07,93.47
VCC11
  Top 0.254: JP48.1 106.68,108.71 97.79,99.82 97.79,98.04 98.55,97.28 100.33,97.28 101.04,96.57 X12.VBUS 101.04,95.3 102.87,93.47 105.92,93.47 | 107.44,93.47 107.72,93.75 U12.8 107.15,94.78 106.72,95.21 U12.7 | 105.92,93.47 107.44,93.47 | 105.92,93.47 105.92,90.93 C34.1 | R12.2 109.64,91.27 107.44,93.47

## Text on the board
Bottom: v13 | v13 | v13 | v13 | v13 | v13 | v13 | v13 | v13 | v13 | v13 | v13
Dimension: Route Out | Route Out | Route Out | Route Out | Route Out | Route Out | Route Out | Route Out | Route Out | Route Out | Route Out | Route Out
tPlace: CP2102 | CP2102 | CP2102 | Breakout | Breakout | Breakout | 3.3V | 3.3V | 3.3V | TXO | TXO | TXO | RXI | RXI | RXI | GND | GND | GND | Power | Power | Power | CP2102 | CP2102 | CP2102 | Breakout | 3.3V | Breakout | 3.3V | Breakout | 3.3V | TXO | TXO | TXO | RXI | RXI | RXI | GND | GND | GND | Power | Power | Power | CP2102 | CP2102 | CP2102 | Breakout | 3.3V | Breakout | 3.3V | Breakout | 3.3V | TXO | TXO | TXO | RXI | RXI | RXI | GND | GND | GND | Power | Power | Power | CP2102 | CP2102 | CP2102 | Breakout | 3.3V | Breakout | 3.3V | Breakout | 3.3V | TXO | TXO | TXO | RXI | RXI | RXI | GND | GND | GND | Power | Power | Power
bPlace: VCC | VCC | VCC | DTR | DTR | DTR | DSR | DSR | DSR | RTS | RTS | RTS | CTS | CTS | CTS | RI | RI | RI | DCD | DCD | DCD | SUSP1 | SUSP1 | SUSP1 | SUSP2 | SUSP2 | SUSP2 | RST | RST | RST | VCC | VCC | VCC | DTR | DTR | DTR | DSR | DSR | DSR | RTS | RTS | RTS | CTS | CTS | CTS | RI | RI | RI | DCD | DCD | DCD | SUSP1 | SUSP1 | SUSP1 | SUSP2 | SUSP2 | SUSP2 | RST | RST | RST | VCC | VCC | VCC | DTR | DTR | DTR | DSR | DSR | DSR | RTS | RTS | RTS | CTS | CTS | CTS | RI | RI | RI | DCD | DCD | DCD | SUSP1 | SUSP1 | SUSP1 | SUSP2 | SUSP2 | SUSP2 | RST | RST | RST | VCC | VCC | VCC | DTR | DTR | DTR | DSR | DSR | DSR | RTS | RTS | RTS | CTS | CTS | CTS | RI | RI | RI | DCD | DCD | DCD | SUSP1 | SUSP1 | SUSP1 | SUSP2 | SUSP2 | SUSP2 | RST | RST | RST